# EAGLE board CapteurTemperature (EAGLE 7.6.0)
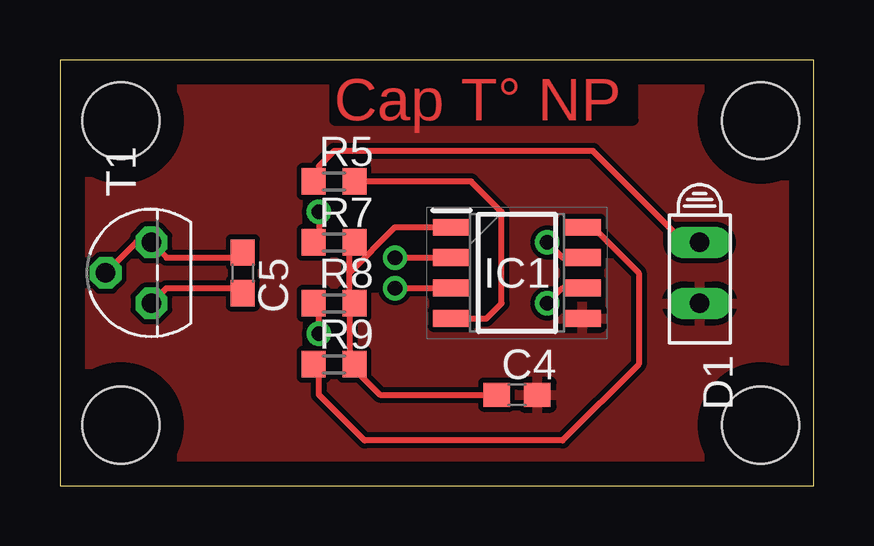
[diagram p0: board, top side]
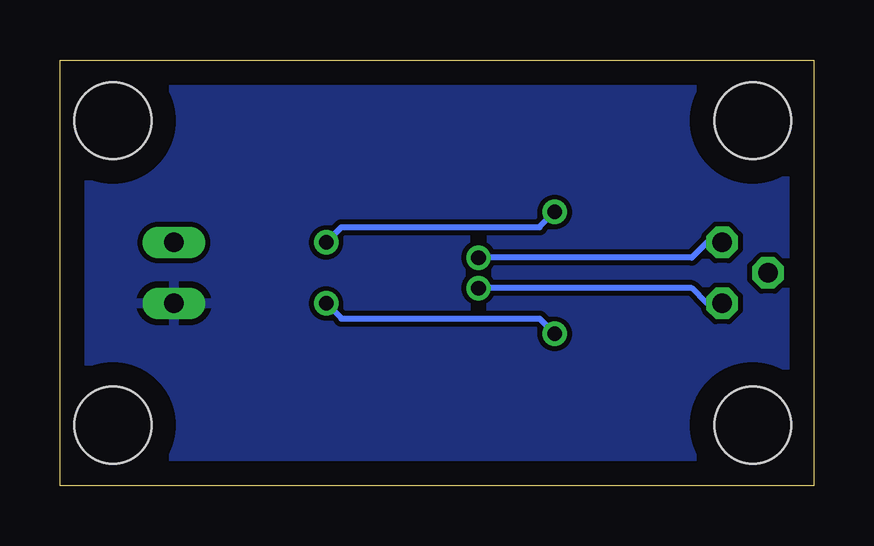
[diagram p1: board, bottom side, seen from below]

Size 31.42 x 17.77 mm. Coordinates in mm from the lower left corner, seen from the top.
Outline: 0,0 31.42,0 31.42,17.77 0,17.77 0,0
Copper layers (1*16): Top 0.035mm / dielectric 1.5mm / Bottom 0.035mm
Design rules "default": minimum track width 10mil, minimum drill 24mil, track to track 8mil, track to pad 8mil, pad to pad 8mil, via to via 8mil, smd to smd 8mil, copper to edge 40mil, drill to drill 8mil, minimum pad ring 10mil, minimum via ring 8mil, stop-mask expansion 4mil, vias tented up to drill 0mil, thermal gap 10mil
Holes 3.2 mm at 2.54,2.54 2.54,15.24 29.21,15.24 29.21,2.54

## Footprints (pad centres in the part's own frame; a part is rotated, then mirrored left to right if it is on the bottom)
C0603 = smd 1.1 x 1: 1 -0.85,0; 2 0.85,0
HLMP6 = drill 0.813 long: A -1.27,0; K 1.27,0
SOIC127P600X175-8N = smd 1.55 x 0.7: 1 -2.725,1.905; 2 -2.725,0.635; 3 -2.725,-0.635; 4 -2.725,-1.905; 5 2.725,-1.905; 6 2.725,-0.635; 7 2.725,0.635; 8 2.725,1.905
R0603 = smd 1 x 1.1: 1 -0.85,0; 2 0.85,0
TO92 = drill 0.813 octagon: 1 1.27,0; 2 0,1.905; 3 -1.27,0

## Placement (x,y rotation side)
C4  [C0603]  19.05,3.81 0 top
C5  [C0603]  7.62,8.89 270 top
D1  HLMP6  [HLMP6]  26.67,8.89 270 top
IC1  [SOIC127P600X175-8N]  19.05,8.89 0 top
R5  [R0603]  11.43,12.7 0 top
R7  [R0603]  11.43,10.16 0 top
R8  [R0603]  11.43,7.62 0 top
R9  [R0603]  11.43,5.08 0 top
T1  2N3904  [TO92]  3.81,8.89 90 top

## Library data of the parts
C4 = rcl; C1: 100 nF
C5 = rcl; C2: 2.2 nF
D1 = display-hp; MF: AGILENT TECHNOLOGIES; MPN: HLMP-6500; OC_FARNELL: 1652490; OC_NEWARK: 40K0088
IC1 = SA56004AD_118; ARROW_PART_NUMBER: SA56004AD,118; ARROW_PRICE-STOCK: https://www.arrow.com/en/products/sa56004ad118/nxp-semiconductors?region=nac; DESCRIPTION: Board Mount Temperature Sensors I2C LOC +/- 2OC AND; HEIGHT: 1.75mm; MANUFACTURER_NAME: NXP; MANUFACTURER_PART_NUMBER: SA56004AD,118; MOUSER_PART_NUMBER: 771-SA56004AD118; MOUSER_PRICE-STOCK: https://www.mouser.co.uk/ProductDetail/NXP-Semiconductors/SA56004AD118?qs=LOCUfHb8d9uULHX2Om8wPw%3D%3D
R5 = eagle-ltspice; SPICEMODEL: NONE; SPICEPREFIX: R
R7-R9 = eagle-ltspice; R: 10 k; SPICEMODEL: NONE; SPICEPREFIX: R
T1 = transistor

## Nets
GND: C4.2 D1.K IC1.5
N$1: C4.1 IC1.1 R7.2 R8.2 R9.2
N$2: IC1.6 R8.1
N$3: IC1.7 R7.1
N$4: IC1.8 R9.1
N$5: C5.1 IC1.2 T1.1 T1.2
N$6: C5.2 IC1.3 T1.3
N$7: IC1.4 R5.2
N$8: D1.A R5.1

## Tracks (layer width: path | path; a pad name or v marks a point on that pad's centre or on a via)
GND
  pour Top: 0,17.78 0,0 31.75,0 31.75,17.78
  pour Bottom: 0,17.78 0,0 31.75,0 31.75,17.78
N$1
  Top 0.254: 12.06,7.62 12.06,5.08 | C4.1 13.33,3.81 12.06,5.08 | 12.06,5.08 R9.2 | 12.06,7.62 12.06,8.89 | 12.06,8.89 12.06,10.16 R7.2 | 12.06,7.62 R8.2 | IC1.1 13.97,10.79 12.06,8.89
N$2  (via drill 0.61)
  Top 0.254: v10.79,6.35 10.79,7.62 R8.1 | v20.32,7.62 20.95,8.25 IC1.6
  Bottom 0.254: v10.79,6.35 11.43,6.98 19.69,6.98 v20.32,7.62
N$3  (via drill 0.61)
  Top 0.254: v10.79,11.43 10.79,10.16 R7.1 | v20.32,10.16 20.95,9.52 IC1.7
  Bottom 0.254: v10.79,11.43 11.43,10.79 19.69,10.79 v20.32,10.16
N$4
  Top 0.254: R9.1 10.79,5.08 10.79,3.81 12.7,1.91 20.95,1.91 24.13,5.08 24.13,8.89 22.23,10.79 IC1.8
N$5  (via drill 0.61)
  Top 0.254: C5.1 7.62,9.52 4.44,9.52 T1.1 3.17,10.16 T1.2 | v13.97,9.52 IC1.2
  Bottom 0.254: v13.97,9.52 5.08,9.52 4.44,10.16 T1.1
N$6  (via drill 0.61)
  Top 0.254: T1.3 4.44,8.25 7.62,8.25 C5.2 | v13.97,8.25 IC1.3
  Bottom 0.254: v13.97,8.25 5.08,8.25 4.44,7.62 T1.3
N$7
  Top 0.254: R5.2 17.14,12.7 18.41,11.43 18.41,7.62 17.78,6.98 IC1.4
N$8
  Top 0.254: D1.A 26.04,10.16 22.23,13.97 11.43,13.97 10.79,13.34 10.79,12.7 R5.1

## Text on the board
Top: Cap T° NP